# Altium PCB PCB1.PcbDoc (part 3 of 3)
Units mm, origin at the board's own origin, x right, y up, seen from the top; angles counter-clockwise.
Board outline 85 x 53 mm, 2 copper layers (Top Layer, Bottom Layer); 9 components, 0 nets, 22 pads, 70 vias.
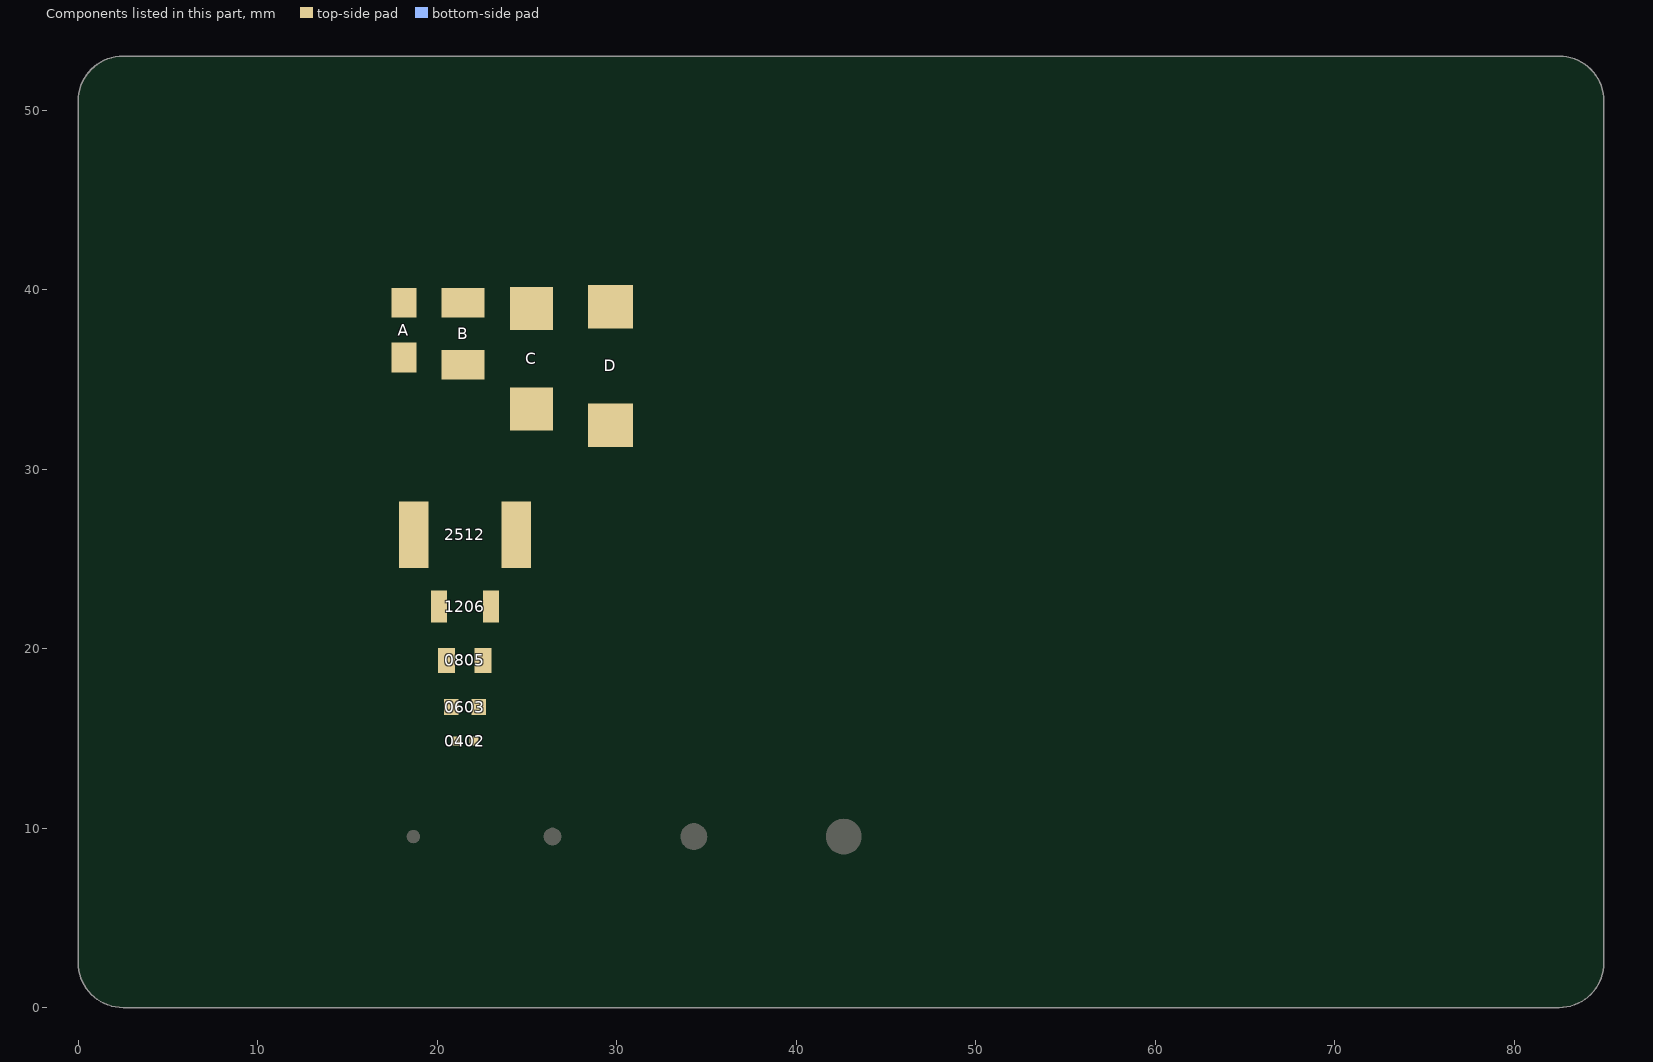
[diagram p3: the components of this part, seen from the top]

## Via types
v1: diameter 1.5, hole 0.9, Top Layer to Bottom Layer, 40 vias
v2: diameter 1.5, hole 1.1, Top Layer to Bottom Layer, 4 vias
v3: diameter 1.1, hole 1.1, Top Layer to Bottom Layer, 2 vias
v4: diameter 2.7, hole 2.2, Top Layer to Bottom Layer, 1 vias
v5: diameter 5.8, hole 5.3, Top Layer to Bottom Layer, 1 vias
v6: diameter 4.8, hole 4.3, Top Layer to Bottom Layer, 1 vias
v7: diameter 3.7, hole 3.2, Top Layer to Bottom Layer, 1 vias
v8: diameter 3.2, hole 2.7, Top Layer to Bottom Layer, 1 vias
v9: diameter 0.8, hole 0.3, Top Layer to Bottom Layer, 1 vias
v10: diameter 0.9, hole 0.4, Top Layer to Bottom Layer, 1 vias
v11: diameter 1, hole 0.5, Top Layer to Bottom Layer, 1 vias
v12: diameter 1.1, hole 0.6, Top Layer to Bottom Layer, 1 vias
v13: diameter 1.2, hole 0.7, Top Layer to Bottom Layer, 1 vias
v14: diameter 1.3, hole 0.8, Top Layer to Bottom Layer, 1 vias
v15: diameter 1.4, hole 0.9, Top Layer to Bottom Layer, 1 vias
v16: diameter 1.5, hole 1, Top Layer to Bottom Layer, 1 vias
v17: diameter 1.6, hole 1.1, Top Layer to Bottom Layer, 1 vias
v18: diameter 1.7, hole 1.2, Top Layer to Bottom Layer, 1 vias
v19: diameter 1.8, hole 1.3, Top Layer to Bottom Layer, 1 vias
v20: diameter 1.9, hole 1.4, Top Layer to Bottom Layer, 1 vias
v21: diameter 1.9, hole 1.5, Top Layer to Bottom Layer, 1 vias
v22: diameter 2.1, hole 1.6, Top Layer to Bottom Layer, 1 vias
v23: diameter 2.2, hole 1.7, Top Layer to Bottom Layer, 1 vias
v24: diameter 2.3, hole 1.8, Top Layer to Bottom Layer, 1 vias
v25: diameter 2.5, hole 2, Top Layer to Bottom Layer, 1 vias
v26: diameter 2.4, hole 1.9, Top Layer to Bottom Layer, 1 vias
v27: diameter 6.9, hole 6.4, Top Layer to Bottom Layer, 1 vias

## Nets (pads, with @x,y where several pads share a name; then routed paths per layer and width w, separated by ;. In a path a pad name is that pad's centre, name@x,y a point inside that pad or via, vN(x,y) a via of type N, cw(c..) or ccw(c..) an arc to the next point about the centre after c; other vN are vias at no path point) (continued)
copper on no net: (continued)
  Bottom Layer w0.05: 11.921,14.44 12.048,14.44 ; 11.921,14.465 12.048,14.465 ; 11.921,16.472 12.048,16.472 ; 11.921,20.637 12.277,20.637 ; 11.921,23.762 12.277,23.762 ; 11.921,24.244 12.048,24.244 ; 11.921,24.27 12.048,24.27 ; 11.921,24.295 12.023,24.295 ; 11.921,24.32 12.023,24.32 ; 11.946,14.135 12.175,14.135 ; 11.946,14.491 12.785,14.491 ; 11.946,14.516 12.277,14.516 ; 11.946,16.421 12.099,16.421 ; 11.946,16.446 12.073,16.446 ; 11.946,18.732 12.048,18.732 ; 11.946,18.758 12.048,18.758 ; 11.946,18.783 12.023,18.783 ; 11.946,18.809 12.023,18.809 ; 11.946,18.834 12.048,18.834 ; 11.946,18.859 12.048,18.859 ; 11.946,21.349 12.073,21.349 ; 11.946,24.092 12.073,24.092 ; 11.946,24.117 12.073,24.117 ; 11.946,24.143 12.073,24.143 ; 11.946,24.168 12.048,24.168 ; 11.946,24.193 12.048,24.193 ; 11.946,24.219 12.048,24.219 ; 11.972,14.11 12.531,14.11 ; 11.972,14.541 12.2,14.541 ; 11.972,14.567 12.15,14.567 ; 11.972,16.37 12.124,16.37 ; 11.972,16.396 12.099,16.396 ; 11.972,18.682 12.2,18.682 ; 11.972,18.707 12.226,18.707 ; 11.972,18.885 12.226,18.885 ; 11.972,18.91 12.226,18.91 ; 11.972,21.374 12.302,21.374 ; 11.972,21.399 12.251,21.399 ; 11.972,21.628 12.099,21.628 ; 11.972,23.787 12.175,23.787 ; 11.972,23.812 12.099,23.812 ; 11.972,23.838 12.099,23.838 ; 11.972,23.863 12.073,23.863 ; 11.972,23.889 12.073,23.889 ; 11.972,23.914 12.073,23.914 ; 11.972,23.939 12.073,23.939 ; 11.972,23.965 12.073,23.965 ; 11.972,23.99 12.073,23.99 ; 11.972,24.016 12.073,24.016 ; 11.972,24.041 12.073,24.041 ; 11.972,24.066 12.073,24.066 ; 11.997,14.592 12.124,14.592 ; 11.997,14.618 12.124,14.618 ; 11.997,14.643 12.124,14.643 ; 11.997,16.319 12.15,16.319 ; 11.997,16.345 12.124,16.345 ; 11.997,17.107 12.404,17.107 ; 11.997,18.656 12.175,18.656 ; 11.997,18.936 12.2,18.936 ; 11.997,21.425 12.2,21.425 ; 11.997,21.45 12.15,21.45 ; 11.997,21.476 12.099,21.476 ; 11.997,21.501 12.099,21.501 ; 11.997,21.526 12.099,21.526 ; 11.997,21.552 12.099,21.552 ; 11.997,21.577 12.099,21.577 ; 11.997,21.603 12.099,21.603 ; 11.997,22.339 12.251,22.339 ; 12.023,14.084 12.48,14.084 ; 12.023,14.668 12.15,14.668 ; 12.023,14.694 12.15,14.694 ; 12.023,14.719 12.15,14.719 ; 12.023,16.269 12.175,16.269 ; 12.023,16.294 12.15,16.294 ; 12.023,17.589 12.277,17.589 ; 12.023,18.961 12.15,18.961 ; 12.023,20.104 12.505,20.104 ; 12.023,20.663 12.378,20.663 ; 12.023,22.593 12.658,22.593 ; 12.023,22.746 12.531,22.746 ; 12.048,14.745 12.175,14.745 ; 12.048,14.77 12.175,14.77 ; 12.048,14.795 12.175,14.795 ; 12.048,16.218 12.175,16.218 ; 12.048,16.243 12.175,16.243 ; 12.048,16.599 12.327,16.599 ; 12.048,18.631 12.124,18.631 ; 12.048,23.406 12.581,23.406 ; 12.073,14.821 12.175,14.821 ; 12.073,14.846 12.2,14.846 ; 12.073,14.872 12.2,14.872 ; 12.073,16.167 12.2,16.167 ; 12.073,16.192 12.2,16.192 ; 12.099,14.059 12.404,14.059 ; 12.099,14.897 12.2,14.897 ; 12.099,14.922 12.226,14.922 ; 12.099,14.948 12.226,14.948 ; 12.099,14.973 12.912,14.973 ; 12.099,16.091 12.226,16.091 ; 12.099,16.116 12.226,16.116 ; 12.099,16.142 12.2,16.142 ; 12.099,17.132 12.404,17.132 ; 12.099,17.615 12.327,17.615 ; 12.099,21.349 12.353,21.349 ; 12.099,22.365 12.251,22.365 ; 12.099,23.381 12.607,23.381 ; 12.124,14.465 12.785,14.465 ; 12.124,14.999 12.454,14.999 ; 12.124,15.024 12.353,15.024 ; 12.124,15.049 12.302,15.049 ; 12.124,16.015 12.531,16.015 ; 12.124,16.04 12.581,16.04 ; 12.124,16.065 12.226,16.065 ; 12.124,18.732 12.226,18.732 ; 12.124,18.859 12.226,18.859 ; 12.124,20.688 12.429,20.688 ; 12.124,22.771 12.556,22.771 ; 12.124,23.355 12.607,23.355 ; 12.124,23.685 12.505,23.685 ; 12.15,15.075 12.251,15.075 ; 12.15,15.1 12.251,15.1 ; 12.15,15.126 12.251,15.126 ; 12.15,15.151 12.277,15.151 ; 12.15,15.176 12.277,15.176 ; 12.15,15.913 12.277,15.913 ; 12.15,15.938 12.277,15.938 ; 12.15,15.964 12.277,15.964 ; 12.15,15.989 12.429,15.989 ; 12.15,16.624 12.353,16.624 ; 12.15,18.758 12.251,18.758 ; 12.15,18.783 12.251,18.783 ; 12.15,18.809 12.251,18.809 ; 12.15,18.834 12.251,18.834 ; 12.15,20.129 12.505,20.129 ; 12.15,21.323 12.378,21.323 ; 12.15,22.39 12.251,22.39 ; 12.15,22.415 12.251,22.415 ; 12.15,22.441 12.251,22.441 ; 12.15,22.466 12.251,22.466 ; 12.15,22.492 12.251,22.492 ; 12.15,22.796 12.581,22.796 ; 12.15,23.33 12.607,23.33 ; 12.175,15.202 12.277,15.202 ; 12.175,15.227 12.277,15.227 ; 12.175,15.253 12.277,15.253 ; 12.175,15.278 12.277,15.278 ; 12.175,15.303 12.302,15.303 ; 12.175,15.329 12.302,15.329 ; 12.175,15.354 12.302,15.354 ; 12.175,15.761 12.302,15.761 ; 12.175,15.786 12.302,15.786 ; 12.175,15.811 12.302,15.811 ; 12.175,15.837 12.277,15.837 ; 12.175,15.862 12.277,15.862 ; 12.175,15.888 12.277,15.888 ; 12.175,17.158 12.429,17.158 ; 12.175,17.64 12.327,17.64 ; 12.175,22.822 12.581,22.822 ; 12.175,22.847 12.607,22.847 ; 12.175,23.279 12.632,23.279 ; 12.175,23.304 12.632,23.304 ; 12.2,14.44 12.759,14.44 ; 12.2,15.38 12.302,15.38 ; 12.2,15.405 12.302,15.405 ; 12.2,15.43 12.302,15.43 ; 12.2,15.456 12.302,15.456 ; 12.2,15.481 12.302,15.481 ; 12.2,15.507 12.302,15.507 ; 12.2,15.532 12.785,15.532 ; 12.2,15.557 12.81,15.557 ; 12.2,15.583 12.429,15.583 ; 12.2,15.608 12.302,15.608 ; 12.2,15.634 12.302,15.634 ; 12.2,15.659 12.302,15.659 ; 12.2,15.684 12.302,15.684 ; 12.2,15.71 12.302,15.71 ; 12.2,15.735 12.302,15.735 ; 12.2,16.65 12.404,16.65 ; 12.2,21.298 12.429,21.298 ; 12.2,22.873 12.607,22.873 ; 12.2,22.898 12.632,22.898 ; 12.2,23.228 12.632,23.228 ; 12.2,23.254 12.632,23.254 ; 12.226,17.666 12.353,17.666 ; 12.226,20.714 12.505,20.714 ; 12.226,22.923 12.632,22.923 ; 12.226,22.949 12.632,22.949 ; 12.226,23.177 12.632,23.177 ; 12.226,23.203 12.632,23.203 ; 12.226,23.66 12.581,23.66 ; 12.251,16.675 12.429,16.675 ; 12.251,17.183 12.48,17.183 ; 12.251,17.691 12.378,17.691 ; 12.251,20.155 12.48,20.155 ; 12.251,21.272 12.454,21.272 ; 12.251,22.974 12.632,22.974 ; 12.251,23 12.632,23 ; 12.251,23.025 12.632,23.025 ; 12.251,23.05 12.632,23.05 ; 12.251,23.076 12.632,23.076 ; 12.251,23.101 12.632,23.101 ; 12.251,23.127 12.632,23.127 ; 12.251,23.152 12.632,23.152 ; 12.277,14.948 12.912,14.948 ; 12.277,17.081 12.429,17.081 ; 12.277,17.716 12.378,17.716 ; 12.302,16.7 12.429,16.7 ; 12.302,17.031 12.48,17.031 ; 12.302,17.056 12.454,17.056 ; 12.302,17.208 12.505,17.208 ; 12.302,17.742 12.378,17.742 ; 12.302,17.767 12.404,17.767 ; 12.302,17.793 12.404,17.793 ; 12.302,17.818 12.404,17.818 ; 12.302,20.739 12.556,20.739 ; 12.302,21.247 12.48,21.247 ; 12.302,23.635 12.607,23.635 ; 12.327,14.135 12.581,14.135 ; 12.327,14.414 12.556,14.414 ; 12.327,15.507 12.708,15.507 ; 12.327,16.065 12.632,16.065 ; 12.327,16.726 12.454,16.726 ; 12.327,17.005 12.48,17.005 ; 12.327,17.843 12.404,17.843 ; 12.327,17.869 12.404,17.869 ; 12.327,17.894 12.404,17.894 ; 12.327,17.92 12.404,17.92 ; 12.327,17.945 12.404,17.945 ; 12.327,17.97 12.404,17.97 ; 12.327,17.996 12.404,17.996 ; 12.327,18.021 12.404,18.021 ; 12.327,18.047 12.404,18.047 ; 12.327,18.072 12.404,18.072 ; 12.327,18.097 12.404,18.097 ; 12.327,18.123 12.429,18.123 ; 12.327,18.148 12.429,18.148 ; 12.327,18.174 12.429,18.174 ; 12.327,18.199 12.429,18.199 ; 12.327,18.224 12.429,18.224 ; 12.327,18.25 12.429,18.25 ; 12.327,18.275 12.429,18.275 ; 12.327,21.222 12.531,21.222 ; 12.353,14.922 12.734,14.922 ; 12.353,16.751 12.48,16.751 ; 12.353,16.98 12.505,16.98 ; 12.353,17.234 12.531,17.234 ; 12.353,18.301 12.429,18.301 ; 12.353,18.326 12.429,18.326 ; 12.353,18.351 12.429,18.351 ; 12.353,18.377 12.429,18.377 ; 12.353,18.402 12.429,18.402 ; 12.353,18.428 12.429,18.428 ; 12.353,18.453 12.429,18.453 ; 12.353,18.478 12.429,18.478 ; 12.353,18.504 12.429,18.504 ; 12.353,18.529 12.429,18.529 ; 12.353,18.555 12.429,18.555 ; 12.353,18.58 12.454,18.58 ; 12.353,18.605 12.454,18.605 ; 12.353,18.631 12.454,18.631 ; 12.353,18.656 12.454,18.656 ; 12.353,18.682 12.454,18.682 ; 12.353,18.707 12.454,18.707 ; 12.353,18.732 12.454,18.732 ; 12.353,20.18 12.429,20.18 ; 12.378,16.777 12.632,16.777 ; 12.378,16.954 12.531,16.954 ; 12.378,17.259 12.556,17.259 ; 12.378,18.758 12.454,18.758 ; 12.378,18.783 12.454,18.783 ; 12.378,18.809 12.454,18.809 ; 12.378,18.834 12.454,18.834 ; 12.378,18.859 12.454,18.859 ; 12.378,18.885 12.454,18.885 ; 12.378,18.91 12.454,18.91 ; 12.378,18.936 12.454,18.936 ; 12.378,18.961 12.454,18.961 ; 12.378,18.986 12.454,18.986 ; 12.378,19.012 12.454,19.012 ; 12.378,19.037 12.48,19.037 ; 12.378,19.063 12.48,19.063 ; 12.378,19.088 12.48,19.088 ; 12.378,19.113 12.48,19.113 ; 12.378,19.139 12.48,19.139 ; 12.378,19.164 12.48,19.164 ; 12.378,20.764 12.632,20.764 ; 12.378,21.196 12.556,21.196 ; 12.378,23.609 12.658,23.609 ; 12.404,16.802 12.632,16.802 ; 12.404,16.827 12.607,16.827 ; 12.404,16.904 12.556,16.904 ; 12.404,16.929 12.531,16.929 ; 12.404,17.285 12.581,17.285 ; 12.404,19.19 12.48,19.19 ; 12.404,19.215 12.48,19.215 ; 12.404,19.24 12.48,19.24 ; 12.404,19.266 12.48,19.266 ; 12.404,19.291 12.48,19.291 ; 12.404,19.317 12.48,19.317 ; 12.404,19.342 12.48,19.342 ; 12.404,19.367 12.48,19.367 ; 12.404,19.393 12.48,19.393 ; 12.404,19.418 12.48,19.418 ; 12.404,19.444 12.48,19.444 ; 12.404,19.469 12.505,19.469 ; 12.404,19.494 12.505,19.494 ; 12.404,19.52 12.505,19.52 ; 12.404,19.545 12.505,19.545 ; 12.404,19.571 12.505,19.571 ; 12.404,19.596 12.505,19.596 ; 12.404,21.171 12.581,21.171 ; 12.404,22.619 12.683,22.619 ; 12.429,14.16 12.607,14.16 ; 12.429,16.853 12.607,16.853 ; 12.429,16.878 12.581,16.878 ; 12.429,19.621 12.505,19.621 ; 12.429,19.647 12.505,19.647 ; 12.429,19.672 12.505,19.672 ; 12.429,19.698 12.505,19.698 ; 12.429,19.723 12.505,19.723 ; 12.429,19.748 12.505,19.748 ; 12.429,19.774 12.505,19.774 ; 12.429,19.799 12.505,19.799 ; 12.429,19.825 12.505,19.825 ; 12.429,19.85 12.505,19.85 ; 12.429,19.875 12.505,19.875 ; 12.429,19.901 12.531,19.901 ; 12.429,19.926 12.531,19.926 ; 12.429,19.952 12.531,19.952 ; 12.429,19.977 12.531,19.977 ; 12.429,20.002 12.531,20.002 ; 12.429,20.028 12.531,20.028 ; 12.429,20.053 12.531,20.053 ; 12.429,20.079 12.505,20.079 ; 12.429,21.145 12.607,21.145 ; 12.454,16.091 12.683,16.091 ; 12.454,17.31 12.607,17.31 ; 12.454,20.79 12.683,20.79 ; 12.454,21.12 12.632,21.12 ; 12.454,23.584 12.683,23.584 ; 12.48,14.186 12.632,14.186 ; 12.48,17.335 12.607,17.335 ; 12.48,17.361 12.607,17.361 ; 12.505,14.211 12.912,14.211 ; 12.505,16.116 12.708,16.116 ; 12.505,17.386 12.607,17.386 ; 12.505,17.412 12.607,17.412 ; 12.505,17.437 12.607,17.437 ; 12.505,17.462 12.607,17.462 ; 12.505,17.488 12.607,17.488 ; 12.505,17.513 12.607,17.513 ; 12.505,17.539 12.607,17.539 ; 12.505,17.564 12.607,17.564 ; 12.505,17.589 12.607,17.589 ; 12.505,17.615 12.607,17.615 ; 12.505,17.64 12.607,17.64 ; 12.505,17.666 12.632,17.666 ; 12.505,17.691 12.632,17.691 ; 12.505,17.716 12.632,17.716 ; 12.505,20.815 12.81,20.815 ; 12.505,21.095 12.658,21.095 ; 12.531,14.237 12.861,14.237 ; 12.531,16.726 12.683,16.726 ; 12.531,16.751 12.658,16.751 ; 12.531,17.742 12.632,17.742 ; 12.531,17.767 12.632,17.767 ; 12.531,17.793 12.632,17.793 ; 12.531,17.818 12.632,17.818 ; 12.531,17.843 12.632,17.843 ; 12.531,17.869 12.632,17.869 ; 12.531,17.894 12.632,17.894 ; 12.531,17.92 12.632,17.92 ; 12.531,17.945 12.632,17.945 ; 12.531,17.97 12.632,17.97 ; 12.531,17.996 12.632,17.996 ; 12.531,18.021 12.632,18.021 ; 12.531,18.047 12.658,18.047 ; 12.531,18.072 12.658,18.072 ; 12.531,18.097 12.658,18.097 ; 12.531,21.069 12.683,21.069 ; 12.531,22.644 12.683,22.644 ; 12.531,23.558 12.683,23.558 ; 12.556,14.262 12.81,14.262 ; 12.556,16.142 12.734,16.142 ; 12.556,16.675 12.708,16.675 ; 12.556,16.7 12.683,16.7 ; 12.556,18.123 12.658,18.123 ; 12.556,18.148 12.658,18.148 ; 12.556,18.174 12.658,18.174 ; 12.556,18.199 12.658,18.199 ; 12.556,18.224 12.658,18.224 ; 12.556,18.25 12.658,18.25 ; 12.556,18.275 12.658,18.275 ; 12.556,18.301 12.658,18.301 ; 12.556,18.326 12.658,18.326 ; 12.556,18.351 12.658,18.351 ; 12.556,18.377 12.658,18.377 ; 12.556,18.402 12.658,18.402 ; 12.556,18.428 12.683,18.428 ; 12.556,18.453 12.683,18.453 ; 12.556,18.478 12.683,18.478 ; 12.556,20.841 12.81,20.841 ; 12.556,21.044 12.708,21.044 ; 12.556,22.669 12.708,22.669 ; 12.556,23.533 12.708,23.533 ; 12.581,14.287 12.759,14.287 ; 12.581,14.313 12.734,14.313 ; 12.581,14.516 12.785,14.516 ; 12.581,16.624 12.734,16.624 ; 12.581,16.65 12.708,16.65 ; 12.581,18.504 12.683,18.504 ; 12.581,18.529 12.683,18.529 ; 12.581,18.555 12.683,18.555 ; 12.581,18.58 12.683,18.58 ; 12.581,18.605 12.683,18.605 ; 12.581,18.631 12.683,18.631 ; 12.581,18.656 12.683,18.656 ; 12.581,18.682 12.683,18.682 ; 12.581,18.707 12.683,18.707 ; 12.581,18.732 12.683,18.732 ; 12.581,18.758 12.683,18.758 ; 12.581,18.783 12.683,18.783 ; 12.581,18.809 12.708,18.809 ; 12.581,18.834 12.708,18.834 ; 12.581,18.859 12.708,18.859 ; 12.581,18.885 12.708,18.885 ; 12.581,20.993 12.734,20.993 ; 12.581,21.018 12.708,21.018 ; 12.581,22.695 12.734,22.695 ; 12.581,23.508 12.734,23.508 ; 12.607,14.338 12.734,14.338 ; 12.607,14.364 12.734,14.364 ; 12.607,15.583 12.962,15.583 ; 12.607,16.167 12.759,16.167 ; 12.607,16.599 12.734,16.599 ; 12.607,18.91 12.708,18.91 ; 12.607,18.936 12.708,18.936 ; 12.607,18.961 12.708,18.961 ; 12.607,18.986 12.708,18.986 ; 12.607,19.012 12.708,19.012 ; 12.607,19.037 12.708,19.037 ; 12.607,19.063 12.708,19.063 ; 12.607,19.088 12.708,19.088 ; 12.607,19.113 12.708,19.113 ; 12.607,19.139 12.708,19.139 ; 12.607,19.164 12.708,19.164 ; 12.607,19.19 12.708,19.19 ; 12.607,19.215 12.734,19.215 ; 12.607,19.24 12.734,19.24 ; 12.607,19.266 12.734,19.266 ; 12.607,20.866 12.81,20.866 ; 12.607,20.968 12.759,20.968 ; 12.607,22.72 12.734,22.72 ; 12.607,22.746 12.734,22.746 ; 12.607,23.482 12.734,23.482 ; 12.632,13.373 13.089,13.373 ; 12.632,14.389 12.759,14.389 ; 12.632,14.414 12.759,14.414 ; 12.632,14.541 12.81,14.541 ; 12.632,16.192 12.886,16.192 ; 12.632,16.523 12.785,16.523 ; 12.632,16.548 12.759,16.548 ; 12.632,16.573 12.759,16.573 ; 12.632,19.291 12.734,19.291 ; 12.632,19.317 12.734,19.317 ; 12.632,19.342 12.734,19.342 ; 12.632,19.367 12.734,19.367 ; 12.632,19.393 12.734,19.393 ; 12.632,19.418 12.734,19.418 ; 12.632,19.444 12.734,19.444 ; 12.632,19.469 12.734,19.469 ; 12.632,19.494 12.734,19.494 ; 12.632,19.52 12.734,19.52 ; 12.632,19.545 12.734,19.545 ; 12.632,19.571 12.734,19.571 ; 12.632,19.596 12.734,19.596 ; 12.632,19.621 12.759,19.621 ; 12.632,19.647 12.886,19.647 ; 12.632,19.672 12.886,19.672 ; 12.632,19.698 12.861,19.698 ; 12.632,20.942 12.785,20.942 ; 12.632,22.771 12.759,22.771 ; 12.632,22.796 12.759,22.796 ; 12.632,23.431 12.759,23.431 ; 12.632,23.457 12.759,23.457 ; 12.658,14.999 12.912,14.999 ; 12.658,16.218 12.886,16.218 ; 12.658,16.472 12.785,16.472 ; 12.658,16.497 12.785,16.497 ; 12.658,19.723 12.861,19.723 ; 12.658,19.748 12.835,19.748 ; 12.658,19.774 12.835,19.774 ; 12.658,19.799 12.912,19.799 ; 12.658,19.825 12.962,19.825 ; 12.658,19.85 12.734,19.85 ; 12.658,19.875 12.734,19.875 ; 12.658,19.901 12.734,19.901 ; 12.658,19.926 12.734,19.926 ; 12.658,19.952 12.734,19.952 ; 12.658,19.977 12.759,19.977 ; 12.658,20.002 12.759,20.002 ; 12.658,20.028 12.759,20.028 ; 12.658,20.053 12.759,20.053 ; 12.658,20.079 12.759,20.079 ; 12.658,20.104 12.759,20.104 ; 12.658,20.129 12.759,20.129 ; 12.658,20.891 12.81,20.891 ; 12.658,20.917 12.785,20.917 ; 12.658,22.822 12.759,22.822 ; 12.658,22.847 12.759,22.847 ; 12.658,22.873 12.759,22.873 ; 12.658,22.898 12.785,22.898 ; 12.658,22.923 12.785,22.923 ; 12.658,23.355 12.785,23.355 ; 12.658,23.381 12.785,23.381 ; 12.658,23.406 12.785,23.406 ; 12.683,14.567 12.81,14.567 ; 12.683,16.243 12.886,16.243 ; 12.683,16.421 12.81,16.421 ; 12.683,16.446 12.81,16.446 ; 12.683,20.155 12.759,20.155 ; 12.683,20.18 12.759,20.18 ; 12.683,20.206 12.759,20.206 ; 12.683,20.231 12.759,20.231 ; 12.683,20.256 12.759,20.256 ; 12.683,20.282 12.759,20.282 ; 12.683,20.307 12.759,20.307 ; 12.683,20.333 12.759,20.333 ; 12.683,20.358 12.759,20.358 ; 12.683,20.383 12.759,20.383 ; 12.683,20.409 12.759,20.409 ; 12.683,20.434 12.759,20.434 ; 12.683,20.46 12.785,20.46 ; 12.683,20.485 12.785,20.485 ; 12.683,20.51 12.785,20.51 ; 12.683,20.536 12.785,20.536 ; 12.683,20.561 12.785,20.561 ; 12.683,20.587 12.785,20.587 ; 12.683,20.612 12.785,20.612 ; 12.683,20.637 12.785,20.637 ; 12.683,20.663 12.937,20.663 ; 12.683,22.949 12.785,22.949 ; 12.683,22.974 12.785,22.974 ; 12.683,23 12.785,23 ; 12.683,23.025 12.785,23.025 ; 12.683,23.05 12.785,23.05 ; 12.683,23.076 12.785,23.076 ; 12.683,23.101 12.785,23.101 ; 12.683,23.127 12.785,23.127 ; 12.683,23.152 12.785,23.152 ; 12.683,23.177 12.785,23.177 ; 12.683,23.203 12.785,23.203 ; 12.683,23.228 12.785,23.228 ; 12.683,23.254 12.785,23.254 ; 12.683,23.279 12.785,23.279 ; 12.683,23.304 12.785,23.304 ; 12.683,23.33 12.785,23.33 ; 12.708,14.186 12.937,14.186 ; 12.708,14.592 12.81,14.592 ; 12.708,14.618 12.835,14.618 ; 12.708,14.643 12.835,14.643 ; 12.708,15.608 12.962,15.608 ; 12.708,16.269 12.861,16.269 ; 12.708,16.345 12.835,16.345 ; 12.708,16.37 12.835,16.37 ; 12.708,16.396 12.835,16.396 ; 12.708,20.688 12.912,20.688 ; 12.708,20.714 12.886,20.714 ; 12.708,20.739 12.886,20.739 ; 12.708,20.764 12.861,20.764 ; 12.708,20.79 12.81,20.79 ; 12.734,14.668 12.835,14.668 ; 12.734,14.694 12.861,14.694 ; 12.734,14.719 12.861,14.719 ; 12.734,14.745 12.861,14.745 ; 12.734,15.024 12.912,15.024 ; 12.734,16.294 12.861,16.294 ; 12.734,16.319 12.861,16.319 ; 12.759,14.16 12.988,14.16 ; 12.759,14.77 12.861,14.77 ; 12.759,14.795 12.886,14.795 ; 12.759,14.821 12.886,14.821 ; 12.759,14.846 12.886,14.846 ; 12.759,15.634 12.962,15.634 ; 12.759,19.85 12.988,19.85 ; 12.785,13.398 13.14,13.398 ; 12.785,14.872 12.886,14.872 ; 12.785,14.897 12.886,14.897 ; 12.785,14.922 12.912,14.922 ; 12.785,15.049 12.937,15.049 ; 12.785,16.116 12.912,16.116 ; 12.785,16.142 12.912,16.142 ; 12.785,16.167 12.886,16.167 ; 12.785,16.599 12.962,16.599 ; 12.785,16.624 12.937,16.624 ; 12.785,16.65 12.912,16.65 ; 12.785,16.675 12.912,16.675 ; 12.785,16.7 12.937,16.7 ; 12.785,19.596 12.912,19.596 ; 12.785,19.621 12.912,19.621 ; 12.785,19.875 13.039,19.875 ; 12.785,19.901 13.064,19.901 ; 12.81,14.135 13.013,14.135 ; 12.81,15.075 12.937,15.075 ; 12.81,15.1 12.937,15.1 ; 12.81,15.659 12.962,15.659 ; 12.81,15.989 12.937,15.989 ; 12.81,16.015 12.937,16.015 ; 12.81,16.04 12.912,16.04 ; 12.81,16.065 12.912,16.065 ; 12.81,16.091 12.912,16.091 ; 12.81,16.573 13.166,16.573 ; 12.81,16.726 12.937,16.726 ; 12.81,16.751 12.962,16.751 ; 12.81,19.545 12.937,19.545 ; 12.81,19.571 12.937,19.571 ; 12.81,19.926 12.912,19.926 ; 12.81,20.612 12.962,20.612 ; 12.81,20.637 12.937,20.637 ; 12.835,15.126 12.937,15.126 ; 12.835,15.151 12.937,15.151 ; 12.835,15.176 12.937,15.176 ; 12.835,15.202 12.937,15.202 ; 12.835,15.227 12.962,15.227 ; 12.835,15.253 12.962,15.253 ; 12.835,15.278 12.962,15.278 ; 12.835,15.684 12.962,15.684 ; 12.835,15.811 12.962,15.811 ; 12.835,15.837 12.962,15.837 ; 12.835,15.862 12.962,15.862 ; 12.835,15.888 12.937,15.888 ; 12.835,15.913 12.937,15.913 ; 12.835,15.938 12.937,15.938 ; 12.835,15.964 12.937,15.964 ; 12.835,16.548 13.14,16.548 ; 12.835,16.777 12.962,16.777 ; 12.835,19.494 12.962,19.494 ; 12.835,19.52 12.962,19.52 ; 12.835,19.952 12.937,19.952 ; 12.835,19.977 12.937,19.977 ; 12.835,20.561 12.962,20.561 ; 12.835,20.587 12.962,20.587 ; 12.861,14.11 13.039,14.11 ; 12.861,15.303 12.962,15.303 ; 12.861,15.329 12.962,15.329 ; 12.861,15.354 12.962,15.354 ; 12.861,15.38 12.962,15.38 ; 12.861,15.405 12.962,15.405 ; 12.861,15.43 12.962,15.43 ; 12.861,15.456 12.962,15.456 ; 12.861,15.481 12.962,15.481 ; 12.861,15.507 12.962,15.507 ; 12.861,15.532 12.962,15.532 ; 12.861,15.557 12.962,15.557 ; 12.861,15.71 12.962,15.71 ; 12.861,15.735 12.962,15.735 ; 12.861,15.761 12.962,15.761 ; 12.861,15.786 12.962,15.786 ; 12.861,16.523 13.115,16.523 ; 12.861,16.802 12.988,16.802 ; 12.861,16.827 12.988,16.827 ; 12.861,19.444 13.293,19.444 ; 12.861,19.469 12.988,19.469 ; 12.861,20.002 12.962,20.002 ; 12.861,20.028 12.962,20.028 ; 12.861,20.053 12.962,20.053 ; 12.861,20.51 12.988,20.51 ; 12.861,20.536 12.988,20.536 ; 12.886,13.424 13.191,13.424 ; 12.886,14.084 13.064,14.084 ; 12.886,16.853 13.013,16.853 ; 12.886,16.878 13.039,16.878 ; 12.886,19.367 13.013,19.367 ; 12.886,19.393 13.166,19.393 ; 12.886,19.418 13.242,19.418 ; 12.886,20.079 12.962,20.079 ; 12.886,20.104 12.988,20.104 ; 12.886,20.129 12.988,20.129 ; 12.886,20.155 12.988,20.155 ; 12.886,20.383 13.013,20.383 ; 12.886,20.409 13.013,20.409 ; 12.886,20.434 12.988,20.434 ; 12.886,20.46 12.988,20.46 ; 12.886,20.485 12.988,20.485 ; 12.912,14.059 13.089,14.059 ; 12.912,16.497 13.089,16.497 ; 12.912,16.904 13.242,16.904 ; 12.912,16.929 13.166,16.929 ; 12.912,19.317 13.039,19.317 ; 12.912,19.342 13.039,19.342 ; 12.912,20.18 12.988,20.18 ; 12.912,20.206 12.988,20.206 ; 12.912,20.231 12.988,20.231 ; 12.912,20.256 13.14,20.256 ; 12.912,20.282 13.115,20.282 ; 12.912,20.307 13.089,20.307 ; 12.912,20.333 13.064,20.333 ; 12.912,20.358 13.039,20.358 ; 12.937,16.954 13.115,16.954 ; 12.937,16.98 13.064,16.98 ; 12.937,17.005 13.039,17.005 ; 12.937,17.031 13.039,17.031 ; 12.937,17.056 13.039,17.056 ; 12.937,17.081 13.039,17.081 ; 12.937,17.107 13.064,17.107 ; 12.937,17.132 13.064,17.132 ; 12.937,19.24 13.064,19.24 ; 12.937,19.266 13.064,19.266 ; 12.937,19.291 13.039,19.291 ; 12.937,19.926 13.089,19.926 ; 12.962,13.449 13.216,13.449 ; 12.962,14.033 13.115,14.033 ; 12.962,17.158 13.064,17.158 ; 12.962,17.183 13.089,17.183 ; 12.962,17.208 13.089,17.208 ; 12.962,17.234 13.089,17.234 ; 12.962,19.164 13.089,19.164 ; 12.962,19.19 13.089,19.19 ; 12.962,19.215 13.064,19.215 ; 12.962,19.952 13.115,19.952 ; 12.988,14.008 13.14,14.008 ; 12.988,17.259 13.115,17.259 ; 12.988,17.285 13.115,17.285 ; 12.988,19.063 13.115,19.063 ; 12.988,19.088 13.115,19.088 ; 12.988,19.113 13.115,19.113 ; 12.988,19.139 13.089,19.139 ; 12.988,19.977 13.14,19.977 ; 13.013,13.983 13.166,13.983 ; 13.013,16.599 13.191,16.599 ; 13.013,17.31 13.14,17.31 ; 13.013,17.335 13.14,17.335 ; 13.013,18.986 13.521,18.986 ; 13.013,19.012 13.191,19.012 ; 13.013,19.037 13.115,19.037 ; 13.013,20.231 13.166,20.231 ; 13.039,13.475 13.267,13.475 ; 13.039,13.932 13.191,13.932 ; 13.039,13.957 13.166,13.957 ; 13.039,17.361 13.166,17.361 ; 13.039,17.386 13.166,17.386 ; 13.039,18.885 13.166,18.885 ; 13.039,18.91 13.166,18.91 ; 13.039,18.936 13.394,18.936 ; 13.039,18.961 13.47,18.961 ; 13.039,20.002 13.166,20.002 ; 13.039,20.18 13.191,20.18 ; 13.039,20.206 13.191,20.206 ; 13.064,13.906 13.216,13.906 ; 13.064,16.624 13.191,16.624 ; 13.064,16.65 13.343,16.65 ; 13.064,16.878 13.318,16.878 ; 13.064,17.412 13.191,17.412 ; 13.064,17.437 13.674,17.437 ; 13.064,18.758 13.191,18.758 ; 13.064,18.783 13.191,18.783 ; 13.064,18.809 13.166,18.809 ; 13.064,18.834 13.166,18.834 ; 13.064,18.859 13.166,18.859 ; 13.064,19.469 13.318,19.469 ; 13.064,20.028 13.318,20.028 ; 13.064,20.053 13.293,20.053 ; 13.064,20.155 13.216,20.155 ; 13.089,13.5 13.267,13.5 ; 13.089,13.881 13.216,13.881 ; 13.089,16.675 13.343,16.675 ; 13.089,17.462 13.826,17.462 ; 13.089,17.488 13.318,17.488 ; 13.089,18.58 13.216,18.58 ; 13.089,18.605 13.216,18.605 ; 13.089,18.631 13.216,18.631 ; 13.089,18.656 13.191,18.656 ; 13.089,18.682 13.191,18.682 ; 13.089,18.707 13.191,18.707 ; 13.089,18.732 13.191,18.732 ; 13.089,20.079 13.267,20.079 ; 13.089,20.129 13.242,20.129 ; 13.115,13.83 13.242,13.83 ; 13.115,13.856 13.242,13.856 ; 13.115,16.7 13.369,16.7 ; 13.115,16.726 13.369,16.726 ; 13.115,16.853 13.978,16.853 ; 13.115,17.513 13.242,17.513 ; 13.115,17.539 13.216,17.539 ; 13.115,17.564 13.216,17.564 ; 13.115,17.589 13.242,17.589 ; 13.115,17.615 13.242,17.615 ; 13.115,17.64 13.242,17.64 ; 13.115,17.666 13.242,17.666 ; 13.115,18.351 13.242,18.351 ; 13.115,18.377 13.242,18.377 ; 13.115,18.402 13.242,18.402 ; 13.115,18.428 13.547,18.428 ; 13.115,18.453 13.623,18.453 ; 13.115,18.478 13.775,18.478 ; 13.115,18.504 13.267,18.504 ; 13.115,18.529 13.216,18.529 ; 13.115,18.555 13.216,18.555 ; 13.115,20.104 13.267,20.104 ; 13.14,13.525 13.293,13.525 ; 13.14,13.779 13.267,13.779 ; 13.14,13.805 13.267,13.805 ; 13.14,16.751 13.369,16.751 ; 13.14,17.691 13.242,17.691 ; 13.14,17.716 13.242,17.716 ; 13.14,17.742 13.242,17.742 ; 13.14,17.767 13.242,17.767 ; 13.14,17.793 13.242,17.793 ; 13.14,17.818 13.242,17.818 ; 13.14,17.843 13.242,17.843 ; 13.14,17.869 13.242,17.869 ; 13.14,17.894 13.242,17.894 ; 13.14,17.92 13.674,17.92 ; 13.14,17.945 13.801,17.945 ; 13.14,17.97 13.369,17.97 ; 13.14,17.996 13.267,17.996 ; 13.14,18.021 13.242,18.021 ; 13.14,18.047 13.242,18.047 ; 13.14,18.072 13.242,18.072 ; 13.14,18.097 13.242,18.097 ; 13.14,18.123 13.242,18.123 ; 13.14,18.148 13.242,18.148 ; 13.14,18.174 13.242,18.174 ; 13.14,18.199 13.242,18.199 ; 13.14,18.224 13.242,18.224 ; 13.14,18.25 13.242,18.25 ; 13.14,18.275 13.242,18.275 ; 13.14,18.301 13.242,18.301 ; 13.14,18.326 13.242,18.326 ; 13.166,13.551 13.318,13.551 ; 13.166,13.703 13.293,13.703 ; 13.166,13.729 13.293,13.729 ; 13.166,13.754 13.267,13.754 ; 13.166,16.777 13.369,16.777 ; 13.166,16.802 13.724,16.802 ; 13.166,16.827 13.826,16.827 ; 13.166,19.494 13.343,19.494 ; 13.191,13.576 13.318,13.576 ; 13.191,13.627 13.318,13.627 ; 13.191,13.652 13.318,13.652 ; 13.191,13.678 13.293,13.678 ; 13.191,16.472 13.572,16.472 ; 13.191,16.497 13.369,16.497 ; 13.191,16.523 13.318,16.523 ; 13.191,16.548 13.318,16.548 ; 13.191,16.573 13.318,16.573 ; 13.191,19.977 13.343,19.977 ; 13.191,20.002 13.318,20.002 ; 13.216,13.602 13.318,13.602 ; 13.216,16.446 13.547,16.446 ; 13.216,16.599 13.318,16.599 ; 13.216,16.624 13.343,16.624 ; 13.216,19.52 13.394,19.52 ; 13.216,19.952 13.343,19.952 ; 13.242,17.412 13.623,17.412 ; 13.242,19.901 13.394,19.901 ; 13.242,19.926 13.369,19.926 ; 13.267,16.421 13.547,16.421 ; 13.267,19.545 13.547,19.545 ; 13.267,19.85 13.42,19.85 ; 13.267,19.875 13.394,19.875 ; 13.293,17.894 13.623,17.894 ; 13.293,19.571 13.547,19.571 ; 13.293,19.825 13.42,19.825 ; 13.318,16.396 13.521,16.396 ; 13.318,19.012 13.547,19.012 ; 13.318,19.596 13.521,19.596 ; 13.318,19.774 13.445,19.774 ; 13.318,19.799 13.445,19.799 ; 13.343,18.402 13.445,18.402 ; 13.343,19.621 13.521,19.621 ; 13.343,19.698 13.496,19.698 ; 13.343,19.723 13.47,19.723 ; 13.343,19.748 13.47,19.748 ; 13.369,19.647 13.496,19.647 ; 13.369,19.672 13.496,19.672 ; 13.394,19.037 13.699,19.037 ; 13.42,16.777 13.724,16.777 ; 13.42,19.52 13.547,19.52 ; 13.445,16.497 13.572,16.497 ; 13.445,19.063 13.674,19.063 ; 13.445,19.469 13.572,19.469 ; 13.445,19.494 13.572,19.494 ; 13.47,16.523 13.572,16.523 ; 13.47,16.548 13.597,16.548 ; 13.47,16.573 13.597,16.573 ; 13.47,18.504 13.775,18.504 ; 13.47,19.393 13.597,19.393 ; 13.47,19.418 13.597,19.418 ; 13.47,19.444 13.572,19.444 ; 13.496,16.599 13.597,16.599 ; 13.496,16.624 13.597,16.624 ; 13.496,16.65 13.75,16.65 ; 13.496,16.675 13.724,16.675 ; 13.496,19.088 13.674,19.088 ; 13.496,19.317 13.623,19.317 ; 13.496,19.342 13.623,19.342 ; 13.496,19.367 13.597,19.367 ; 13.521,16.7 13.724,16.7 ; 13.521,16.726 13.724,16.726 ; 13.521,16.751 13.724,16.751 ; 13.521,19.113 13.674,19.113 ; 13.521,19.215 13.648,19.215 ; 13.521,19.24 13.648,19.24 ; 13.521,19.266 13.648,19.266 ; 13.521,19.291 13.623,19.291 ; 13.547,17.488 13.826,17.488 ; 13.547,17.97 13.801,17.97 ; 13.547,18.529 13.775,18.529 ; 13.547,19.139 13.674,19.139 ; 13.547,19.164 13.674,19.164 ; 13.547,19.19 13.648,19.19 ; 13.572,19.012 13.699,19.012 ; 13.597,18.555 13.775,18.555 ; 13.597,18.885 13.724,18.885 ; 13.597,18.91 13.724,18.91 ; 13.597,18.936 13.699,18.936 ; 13.597,18.961 13.699,18.961 ; 13.597,18.986 13.699,18.986 ; 13.623,16.624 13.75,16.624 ; 13.623,17.513 13.801,17.513 ; 13.623,17.996 13.801,17.996 ; 13.623,18.58 13.75,18.58 ; 13.623,18.707 13.75,18.707 ; 13.623,18.732 13.75,18.732 ; 13.623,18.758 13.75,18.758 ; 13.623,18.783 13.724,18.783 ; 13.623,18.809 13.724,18.809 ; 13.623,18.834 13.724,18.834 ; 13.623,18.859 13.724,18.859 ; 13.648,16.472 13.978,16.472 ; 13.648,16.497 14.004,16.497 ; 13.648,16.523 14.029,16.523 ; 13.648,16.548 13.75,16.548 ; 13.648,16.573 13.75,16.573 ; 13.648,16.599 13.75,16.599 ; 13.648,16.878 13.978,16.878 ; 13.648,18.021 13.801,18.021 ; 13.648,18.605 13.75,18.605 ; 13.648,18.631 13.75,18.631 ; 13.648,18.656 13.75,18.656 ; 13.648,18.682 13.75,18.682 ; 13.674,16.446 13.928,16.446 ; 13.674,17.539 13.801,17.539 ; 13.674,17.564 13.801,17.564 ; 13.674,17.589 13.775,17.589 ; 13.674,17.615 13.801,17.615 ; 13.674,17.64 13.801,17.64 ; 13.674,17.666 13.801,17.666 ; 13.674,17.691 13.801,17.691 ; 13.674,17.716 13.801,17.716 ; 13.674,18.047 13.801,18.047 ; 13.674,18.072 13.801,18.072 ; 13.674,18.097 13.801,18.097 ; 13.674,18.123 13.801,18.123 ; 13.674,18.148 13.801,18.148 ; 13.674,18.174 13.801,18.174 ; 13.674,18.199 13.801,18.199 ; 13.674,18.224 13.775,18.224 ; 13.674,18.25 13.775,18.25 ; 13.674,18.275 13.775,18.275 ; 13.674,18.301 13.775,18.301 ; 13.674,18.326 13.775,18.326 ; 13.674,18.351 13.775,18.351 ; 13.674,18.377 13.775,18.377 ; 13.674,18.402 13.775,18.402 ; 13.674,18.428 13.775,18.428 ; 13.674,18.453 13.775,18.453 ; 13.699,17.742 13.801,17.742 ; 13.699,17.767 13.801,17.767 ; 13.699,17.793 13.801,17.793 ; 13.699,17.818 13.801,17.818 ; 13.699,17.843 13.801,17.843 ; 13.699,17.869 13.801,17.869 ; 13.699,17.894 13.801,17.894 ; 13.699,17.92 13.801,17.92 ; 13.724,17.412 13.851,17.412 ; 13.724,17.437 13.851,17.437 ; 13.75,16.904 13.978,16.904 ; 13.75,17.361 13.877,17.361 ; 13.75,17.386 13.877,17.386 ; 13.775,17.285 13.902,17.285 ; 13.775,17.31 13.902,17.31 ; 13.775,17.335 13.877,17.335 ; 13.801,17.183 13.928,17.183 ; 13.801,17.208 13.928,17.208 ; 13.801,17.234 13.902,17.234 ; 13.801,17.259 13.902,17.259 ; 13.826,16.929 13.978,16.929 ; 13.826,17.056 13.953,17.056 ; 13.826,17.081 13.953,17.081 ; 13.826,17.107 13.953,17.107 ; 13.826,17.132 13.928,17.132 ; 13.826,17.158 13.928,17.158 ; 13.851,16.954 13.953,16.954 ; 13.851,16.98 13.953,16.98 ; 13.851,17.005 13.953,17.005 ; 13.851,17.031 13.953,17.031 ; 13.877,16.548 14.029,16.548 ; 13.877,16.802 14.004,16.802 ; 13.877,16.827 14.004,16.827 ; 13.902,16.599 14.029,16.599 ; 13.902,16.624 14.029,16.624 ; 13.902,16.65 14.029,16.65 ; 13.902,16.675 14.004,16.675 ; 13.902,16.7 14.004,16.7 ; 13.902,16.726 14.004,16.726 ; 13.902,16.751 14.004,16.751 ; 13.902,16.777 14.004,16.777 ; 13.928,16.573 14.029,16.573
  other v1: 1.27,3.81 3.81,3.81 6.35,3.81 8.89,3.81 11.43,3.81 13.97,3.81 16.51,3.81 19.05,3.81 21.59,3.81 24.13,3.81 26.67,3.81 29.21,3.81 31.75,3.81 34.29,3.81 36.83,3.81 39.37,3.81 41.91,3.81 44.45,3.81 46.99,3.81 49.53,3.81 1.27,6.35 3.81,6.35 6.35,6.35 8.89,6.35 11.43,6.35 13.97,6.35 16.51,6.35 19.05,6.35 21.59,6.35 24.13,6.35 26.67,6.35 29.21,6.35 31.75,6.35 34.29,6.35 36.83,6.35 39.37,6.35 41.91,6.35 44.45,6.35 46.99,6.35 49.53,6.35
  other v2: 80,13 65,17.8 70,17.8 75,17.8
  other v3: 85,13 85,17.8
  other v4: 82.779,7.827
  other v5: 64.325,7.825
  other v6: 70.325,7.825
  other v7: 75.325,7.825
  other v8: 79.325,7.825
  other v9: 4,9.4
  other v10: 4,10.45
  other v11: 4,11.6
  other v12: 4,12.75
  other v13: 4,14
  other v14: 4,15.4
  other v15: 4,17
  other v16: 4,18.7
  other v17: 4,20.5
  other v18: 4,22.4
  other v19: 4,24.4
  other v20: 4,26.5
  other v21: 4,28.7
  other v22: 4,31.05
  other v23: 4,33.475
  other v24: 4,35.9
  other v25: 4,40.9
  other v26: 4,38.4
  other v27: 57.45,7.725

## Keep-outs
Keep-Out Layer:
  the board outline again, w0.2

## Other copper
Top Layer:
  rectangle: 65.746,42.24 70.826,42.443
  rectangle: 65.746,40.44 70.826,40.694
  rectangle: 65.746,38.64 70.826,38.945
  rectangle: 65.746,36.74 70.826,37.121
  rectangle: 65.746,34.84 70.826,35.348
  rectangle: 65.746,32.64 70.826,33.402
  rectangle: 65.746,30.24 70.826,31.256
  rectangle: 65.746,27.64 70.826,28.91
  rectangle: 65.746,24.34 70.826,26.245
  rectangle: 65.746,20.44 70.826,22.98
  rectangle: 60.046,20.44 65.126,22.98
  rectangle: 60.046,24.34 65.126,26.245
  rectangle: 60.046,27.64 65.126,28.91
  rectangle: 60.046,30.24 65.126,31.256
  rectangle: 60.046,32.64 65.126,33.402
  rectangle: 60.046,34.84 65.126,35.348
  rectangle: 60.046,36.74 65.126,37.121
  rectangle: 60.046,38.64 65.126,38.945
  rectangle: 60.046,40.44 65.126,40.694
  rectangle: 60.046,42.24 65.126,42.443

## Silkscreen, mask and mechanical layers (free items; w line width, h text height)
Top Overlay:
  circle w0.2: c80,13 r1.414
  lines w0.2: 5.5,8.4 5.5,44.4 ; 8.5,44.4 8.5,42.4 ; 11.5,8.4 15.5,8.4 15.5,43.4 15.5,44.4 ; 11.5,42.4 15.5,42.4 ; 12.5,44.4 12.5,42.4 ; 39.846,13.64 39.846,25.64 ; 42.846,30.64 42.846,40.64 ; 45.846,13.64 45.846,25.64 ; 45.846,30.64 45.846,40.64 ; 77,17.8 78,17.8 ; 81.414,13 83,13 ; 82,17.8 83,17.8 ; 8.5,8.4 8.5,42.4 ; 8.5,8.4 12.5,8.4 12.5,42.4 ; 8.5,8.4 2.5,8.4 2.5,42.4 8.5,42.4 ; 8.5,42.4 12.5,42.4 ; 33.846,13.64 33.846,28.64 56.846,28.64 56.846,13.64 33.846,13.64 ; 33.846,30.64 56.846,30.64 56.846,43.64 33.846,43.64 33.846,30.64 ; 78,16.8 78,18.8 82,18.8 82,16.8 78,16.8
  lines w0.3: 2.5,45.5 2.5,52 ; 3.5,48.5 3.5,52 ; 4.5,48.5 4.5,52 ; 5.5,48.5 5.5,52 ; 6.5,48.5 6.5,52 ; 7.5,47 7.5,52 ; 8.5,48.5 8.5,52 ; 9.5,48.5 9.5,52 ; 10.5,48.5 10.5,52 ; 11.5,48.5 11.5,52 ; 12.5,45.5 12.5,52 ; 13.5,48.5 13.5,52 ; 14.5,48.5 14.5,52 ; 15.5,48.5 15.5,52 ; 16.5,48.5 16.5,52 ; 17.5,47 17.5,52 ; 18.5,48.5 18.5,52 ; 19.5,48.5 19.5,52 ; 20.5,48.5 20.5,52 ; 21.5,48.5 21.5,52 ; 22.5,45.5 22.5,52 ; 23.5,48.5 23.5,52 ; 24.5,48.5 24.5,52 ; 25.5,48.5 25.5,52 ; 26.5,48.5 26.5,52 ; 27.5,47 27.5,52 ; 28.5,48.5 28.5,52 ; 29.5,48.5 29.5,52 ; 30.5,48.5 30.5,52 ; 31.5,48.5 31.5,52 ; 32.5,45.5 32.5,52 ; 33.5,48.5 33.5,52 ; 34.5,48.5 34.5,52 ; 35.5,48.5 35.5,52 ; 36.5,48.5 36.5,52 ; 37.5,47 37.5,52 ; 38.5,48.5 38.5,52 ; 39.5,48.5 39.5,52 ; 40.5,48.5 40.5,52 ; 41.5,48.5 41.5,52 ; 42.5,45.5 42.5,52 ; 43.5,48.5 43.5,52 ; 44.5,48.5 44.5,52 ; 45.5,48.5 45.5,52 ; 46.5,48.5 46.5,52 ; 47.5,47 47.5,52 ; 48.5,48.5 48.5,52 ; 49.5,48.5 49.5,52 ; 50.5,48.5 50.5,52 ; 51.5,48.5 51.5,52 ; 52.5,45.5 52.5,52 ; 53.5,48.5 53.5,52 ; 54.5,48.5 54.5,52 ; 55.5,48.5 55.5,52 ; 56.5,48.5 56.5,52 ; 57.5,47 57.5,52 ; 58.5,48.5 58.5,52 ; 59.5,48.5 59.5,52 ; 60.5,48.5 60.5,52 ; 61.5,48.5 61.5,52 ; 62.5,45.5 62.5,52 ; 63.5,48.5 63.5,52 ; 64.5,48.5 64.5,52 ; 65.5,48.5 65.5,52 ; 66.5,48.5 66.5,52 ; 67.5,47 67.5,52 ; 68.5,48.5 68.5,52 ; 69.5,48.5 69.5,52 ; 70.5,48.5 70.5,52 ; 71.5,48.5 71.5,52 ; 72.5,45.5 72.5,52 ; 73.5,48.5 73.5,52 ; 74.5,48.5 74.5,52 ; 75.5,48.5 75.5,52 ; 76.5,48.5 76.5,52 ; 77.5,47 77.5,52 ; 78.5,48.5 78.5,52 ; 79.5,48.5 79.5,52 ; 80.5,48.5 80.5,52 ; 81.5,48.5 81.5,52 ; 82.5,45.5 82.5,52
  text "5" at 53.016,45.538 h3
  text "7" at 73.022,45.532 h3
  text "4" at 43.012,45.512 h3
  text "0" at 3,45.5 h3
  text "1" at 13.003,45.5 h3
  text "2" at 23.003,45.5 h3
  text "3" at 33.009,45.5 h3
  text "6" at 63.019,45.5 h3
  text "2" at 10.6,43.2 h0.82
  text "mm" at 6.2,42.9 h0.82
  text "mm" at 8.9,42.9 h0.82
  text "AWG" at 12.9,42.9 h0.82
  text "8MIL" at 61.04,42.64 h1.7
  text ".20MM" at 66.055,42.64 h1.7
  text "1.27" at 80.4,42.2 h0.82
  text "C" at 24.346,41.04 h3
  text "A" at 17.246,41.008 h3
  text "B" at 20.746,41.008 h3
  text "D" at 28.646,41.008 h3
  text "10MIL" at 60.669,40.94 h1.7
  text ".25MM" at 66.055,40.94 h1.7
  text "2.0" at 6,40.5 h0.82
  text "3.14" at 9.2,40.5 h0.82
  text "12" at 13,40.5 h0.82
  text "EIA SMD TANTALUM" at 33.846,39.64 h2
  text "12MIL" at 60.669,39.14 h1.7
  text "0.3MM" at 66.018,39.14 h1.7
  text "0.8" at 80.4,38.8 h0.82
  text "1.9" at 6.068,38 h0.82
  text "2.83" at 9.132,38 h0.82
  text "3216-18" at 34.846,37.64 h2
  text "A" at 43.846,37.64 h2
  text "3.2×1.6×1.8" at 46.846,37.64 h2
  text "15MIL" at 60.669,37.34 h1.7
  text "0.4MM" at 66.018,37.34 h1.7
  text "3528-21" at 34.846,35.64 h2
  text "B" at 43.846,35.64 h2
  text "3.5×2.8×2.1" at 46.846,35.64 h2
  text "20MIL" at 60.607,35.54 h1.7
  text "0.5MM" at 66.018,35.54 h1.7
  text "1.8" at 6.068,35.5 h0.82
  text "2.54" at 9.132,35.5 h0.82
  text "0.7" at 80.4,35.4 h0.82
  text "6032-28" at 34.846,33.64 h2
  text "C" at 43.846,33.64 h2
  text "6.0×3.2×2.8" at 46.846,33.64 h2
  text "30MIL" at 60.618,33.54 h1.7
  text ".75MM" at 66.055,33.54 h1.7
  text "1.7" at 6.068,33 h0.82
  text "2.27" at 9.132,33 h0.82
  text "0.65" at 80.4,32 h0.82
  text "7343-31" at 34.846,31.64 h2
  text "D" at 43.846,31.64 h2
  text "7.3×4.3×3.1" at 46.846,31.64 h2
  text "40MIL" at 60.595,31.44 h1.7
  text "1.0MM" at 66.069,31.44 h1.7
  text "1.6" at 6.068,30.5 h0.82
  text "2.01" at 9.268,30.5 h0.82
  text "14" at 13.068,30.5 h0.82
  text "50MIL" at 60.618,29.04 h1.7
  text "1.25MM" at 65.646,29.04 h1.7
  text "0.635" at 80.4,28.6 h0.82
  text "1.5" at 6.068,28.2 h0.82
  text "1.77" at 9.2,28.2 h0.82
  text "75MIL" at 60.622,26.44 h1.7
  text "2.0MM" at 66.007,26.44 h1.7
  text "1.4" at 6.068,26 h0.82
  text "1.54" at 9.2,26 h0.82
  text "2512" at 26.046,25.54 h3
  text "0.5" at 80.4,25.2 h0.82
  text "NEW OLD SMD SIZES" at 33.846,24.64 h2
  text "1.3" at 6.068,24 h0.82
  text "1.33" at 9.2,24 h0.82
  text "16" at 13.068,24 h0.82
  text "100MIL" at 60.246,23.14 h1.7
  text "2.5MM" at 66.007,23.14 h1.7
  text "6432" at 34.846,22.64 h2
  text "2512" at 40.846,22.64 h2
  text "6.4×3.2mm" at 46.846,22.64 h2
  text "1.2" at 6.068,22 h0.82
  text "1.13" at 9.268,22 h0.82
  text "0.4" at 80.4,21.8 h0.82
  text "1206" at 26.049,21.64 h3
  text "3216" at 34.846,20.64 h2
  text "1206" at 40.846,20.64 h2
  text "3.2×2.5mm" at 46.846,20.64 h2
  text "1.1" at 6.205,20.1 h0.82
  text "0.95" at 9.132,20.1 h0.82
  text "18" at 13.205,20.1 h0.82
  text "2012" at 34.846,18.64 h2
  text "0805" at 40.846,18.64 h2
  text "2.0×1.25mm" at 46.846,18.64 h2
  text "0805" at 26.049,18.54 h3
  text "1.0" at 6.068,18.3 h0.82
  text "0.79" at 9.132,18.3 h0.82
  text "1608" at 34.846,16.64 h2
  text "0603" at 40.846,16.64 h2
  text "1.6×0.8mm" at 46.846,16.64 h2
  text "0.9" at 6,16.6 h0.82
  text "0.64" at 9.132,16.6 h0.82
  text "0603" at 26.049,16.14 h3
  text "20mm" at 65.8,15.3 h0.82
  text "15mm" at 71.1,15.3 h0.82
  text "10mm" at 78.7,15.3 h0.82
  text "0.8" at 6,15 h0.82
  text "0.5" at 9.542,15 h0.82
  text "1005" at 34.846,14.64 h2
  text "0402" at 40.846,14.64 h2
  text "1.0×0.5mm" at 46.846,14.64 h2
  text "0402" at 26.049,13.94 h3
  text "0.7" at 6,13.6 h0.82
  text "0.38" at 9.132,13.6 h0.82
  text "22" at 13,13.6 h0.82
  text "0.6" at 6,12.3 h0.82
  text "0.28" at 9.132,12.3 h0.82
  text "24" at 13,12.3 h0.82
  text "0.5" at 6,11.2 h0.82
  text "0.2" at 9.542,11.2 h0.82
  text "TEST POINTS" at 18.275,10.925 h2
  text "5mm" at 81.8,10.5 h0.82
  text "0.4" at 6,10.1 h0.82
  text "0.12" at 9.2,10.1 h0.82
  text "0.3" at 6,9 h0.82
  text "0.07" at 9.132,9 h0.82
  text "28" at 13,9 h0.82
  text ".75mm" at 19.675,8.925 h2
  text "1.0mm" at 27.676,8.925 h2
  text "1.5mm" at 35.676,8.925 h2
  text "2.0mm" at 44.475,8.925 h2
  text "M5" at 63.325,2.825 h2
  text "M4" at 69.325,2.825 h2
  text "M3" at 74.325,2.825 h2
  text "M2.5" at 77.325,2.825 h2
  text "M2" at 81.779,2.827 h2
  text "M6" at 56.45,2.725 h2
  text "2" at 3.429,1.397 h2
  text "4" at 8.509,1.397 h2
  text "6" at 13.589,1.397 h2
  text "8" at 18.669,1.397 h2
  text "10" at 23.368,1.397 h2
  text "12" at 28.448,1.397 h2
  text "14" at 33.528,1.397 h2
  text "16" at 38.608,1.397 h2
  text "18" at 43.688,1.397 h2
  text "20" at 48.768,1.397 h2
  text "2.7" at 78.1,1.125 h2
  text "5.3" at 63.3,1.1 h2
  text "4.3" at 69.3,1.1 h2
  text "3.2" at 74.3,1.1 h2
  text "2.4" at 81.754,1.102 h2
  text "6.4" at 56.425,1 h2
Bottom Overlay:
  drawing of 201 lines, arcs and shapes, not listed
  text "1" at 4.902,47.955 h1.8
  text "9" at 9.982,47.955 h1.8
  text "8" at 12.522,47.955 h1.8
  text "7" at 15.062,47.955 h1.8
  text "6" at 17.602,47.955 h1.8
  text "5" at 20.142,47.955 h1.8
  text "4" at 22.682,47.955 h1.8
  text "3" at 25.222,47.955 h1.8
  text "2" at 27.762,47.955 h1.8
  text "1" at 30.302,47.955 h1.8
  text "3/4" at 39.167,45.39 h2
  text "1/2" at 45.441,45.39 h2
  text "1/4" at 51.765,45.39 h2
  text "3/4" at 64.567,45.39 h2
  text "1/2" at 70.841,45.39 h2
  text "1/4" at 77.165,45.39 h2
  text "3" at 7.671,45.364 h2
  text "2" at 33.071,45.364 h2
  text "1" at 58.471,45.364 h2
  text "S" at 21.5,42.87 h2
  text "D" at 32.5,42.87 h2
  text "C" at 44.2,42.87 h2
  text "E" at 55.2,42.87 h2
  text "2" at 74.098,41.809 h1.5
  text "P" at 71.898,41.109 h2
  text "V" at 75.398,41.109 h2
  text "G" at 28.5,40.37 h2
  text "ARIAL FONT HEIGHT" at 16,39.5 h2
  text "2" at 79.298,39.009 h1.5
  text "I" at 71.498,38.809 h2
  text "R" at 75.198,38.809 h2
  text "1.0mm" at 12.92,38.739 h1
  text "×" at 68.398,38.609 h1.52
  text "×" at 78.498,38.509 h1.5
  text "R" at 67.498,38.409 h2
  text "I" at 68.898,38.409 h2
  text "B" at 51.3,38.37 h2
  text "B" at 62.3,38.37 h2
  text "R" at 77.698,38.309 h2
  text "I" at 79.598,38.309 h2
  text "1.2mm" at 13.178,37.789 h1.2
  text "G" at 39.55,36.77 h2
  text "1.5mm" at 13.565,36.639 h1.5
  text "1.7mm" at 13.823,35.364 h1.7
  text "V" at 71.898,34.909 h2
  text "P" at 74.898,34.909 h2
  text "×" at 65.698,34.809 h1.5
  text "×" at 79.898,34.809 h1.5
  text "R" at 64.898,34.609 h2
  text "P" at 66.798,34.609 h2
  text "V" at 79.198,34.609 h2
  text "I" at 80.398,34.609 h2
  text "2.0mm" at 14.283,33.864 h2
  text "V" at 66.298,32.209 h2
  text "D" at 21.5,32.12 h2
  text "S" at 32.5,32.12 h2
  text "E" at 44.2,32.07 h2
  text "C" at 55.2,32.07 h2
  text "2.5mm" at 14.95,32.036 h2.5
  text "R" at 71.898,31.909 h2
  text "I" at 74.898,31.909 h2
  text "/" at 79.698,31.909 h1.5
  text "R" at 78.998,31.709 h2
  text "P" at 80.898,31.709 h2
  text "I" at 65.798,30.109 h2
  text "NPN" at 47.2,30 h2
  text "PNP" at 58,30 h2
  text "3.0mm" at 15.593,29.939 h3
  text "2" at 66.898,29.009 h1.5
  text "P" at 78.398,29.009 h2
  text "V" at 68.098,28.309 h2
  text "P-CH (ENH)" at 24,28.1 h2
  text "N-CH (ENH)" at 35,28 h2
  text "P" at 72.098,27.809 h2
  text "V" at 74.998,27.809 h2
  text "V" at 78.498,26.709 h2
  text "2" at 71.698,26.209 h1.5
  text "P" at 67.998,26.009 h2
  text "I" at 71.998,25.509 h2
  text "R" at 74.898,25.509 h2
  text "mm = 2.54 × inch" at 33,24.5 h2
  text "f - femto -10^-15" at 49,24.5 h2
  text "P - peta - 10^15" at 63,24.5 h2
  text "mm = 0.0254 × mil" at 33,22.5 h2
  text "p - pico - 10^-12" at 49,22.5 h2
  text "T - tera - 10^12" at 63,22.5 h2
  text "inch = mm / 25.4" at 33,20.5 h2
  text "n - nano - 10^-9" at 49,20.5 h2
  text "G - giga - 10^9" at 63,20.5 h2
  text "mil = mm / 0.0254" at 33,18.5 h2
  text "μ - micro - 10^-6" at 49,18.5 h2
  text "M - mega - 10^6" at 63,18.5 h2
  text "m - milli - 10^-3" at 49,16.5 h2
  text "k - kilo - 10^3" at 63,16.5 h2
  text "Cathode" at 73.525,15 h2
  text "Anode" at 83.039,15 h2
  text "c - centi - 10^-2" at 49,14.5 h2
  text "h - hecto - 10^2" at 63,14.5 h2
  text "+  A" at 31.422,14.177 h2
  text "−" at 68.039,13.1 h2
  text "+" at 83.039,13.1 h2
  text "d - deci - 10^-1" at 49,12.5 h2
  text "da - deka - 10^1" at 63,12.5 h2
  text "C" at 29.172,9.427 h2
  text "JLCJLCJLCJLC" at 83.5,1.175 h1
  text "designed by Another Reality" at 25.5,1 h2
Top Solder:
  drawing of 361 lines, arcs and shapes, not listed
Bottom Solder:
  drawing of 2682 lines, arcs and shapes, not listed
Board:
  lines w0.3: 0,2.5 ccw(c2.5,2.5) 2.5,0 ; 0,0 0,50.5 cw(c2.5,50.5) 2.5,53 82.5,53 cw(c82.5,50.5) 85,50.5 85,2.5 cw(c82.5,2.5) 82.5,0 0,0